# EAGLE board HarpyFC (EAGLE 9.5.1)
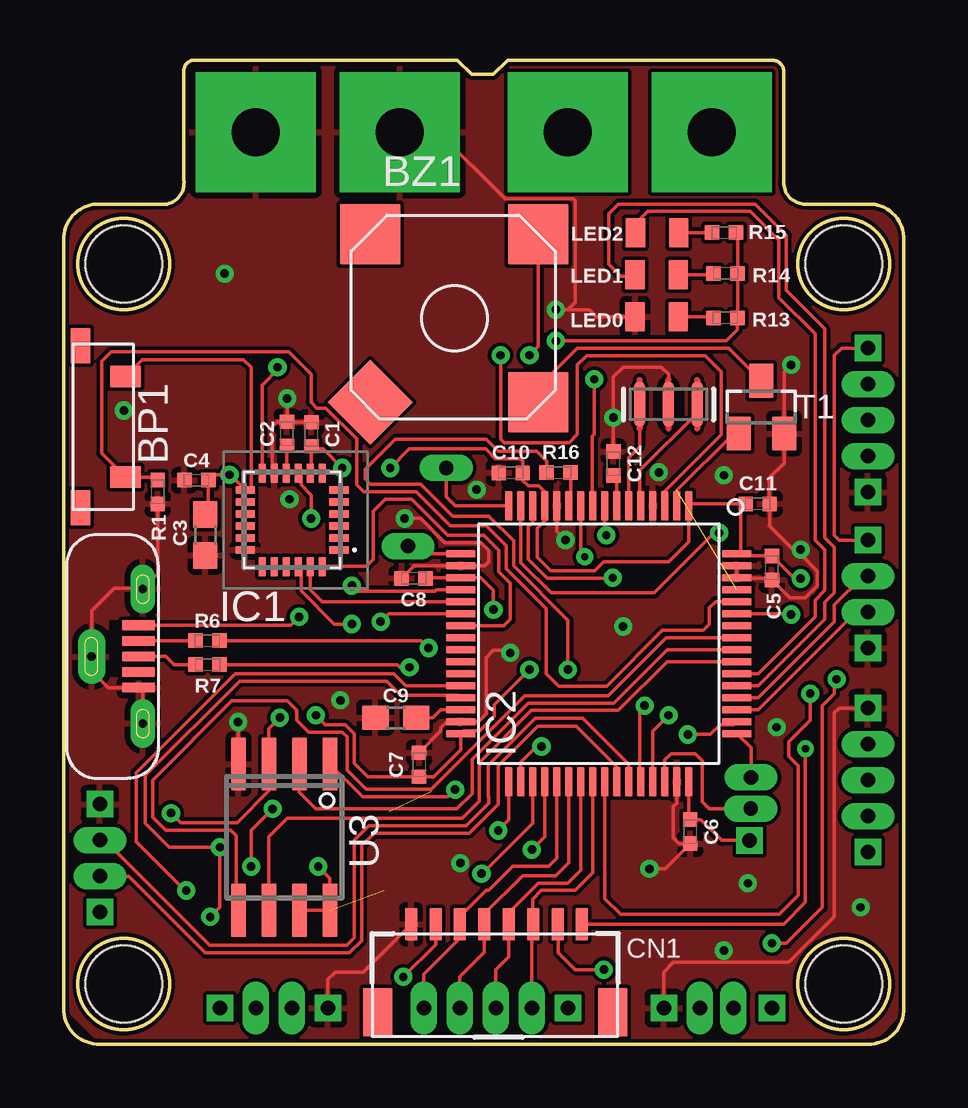
[diagram p0: board, top side]
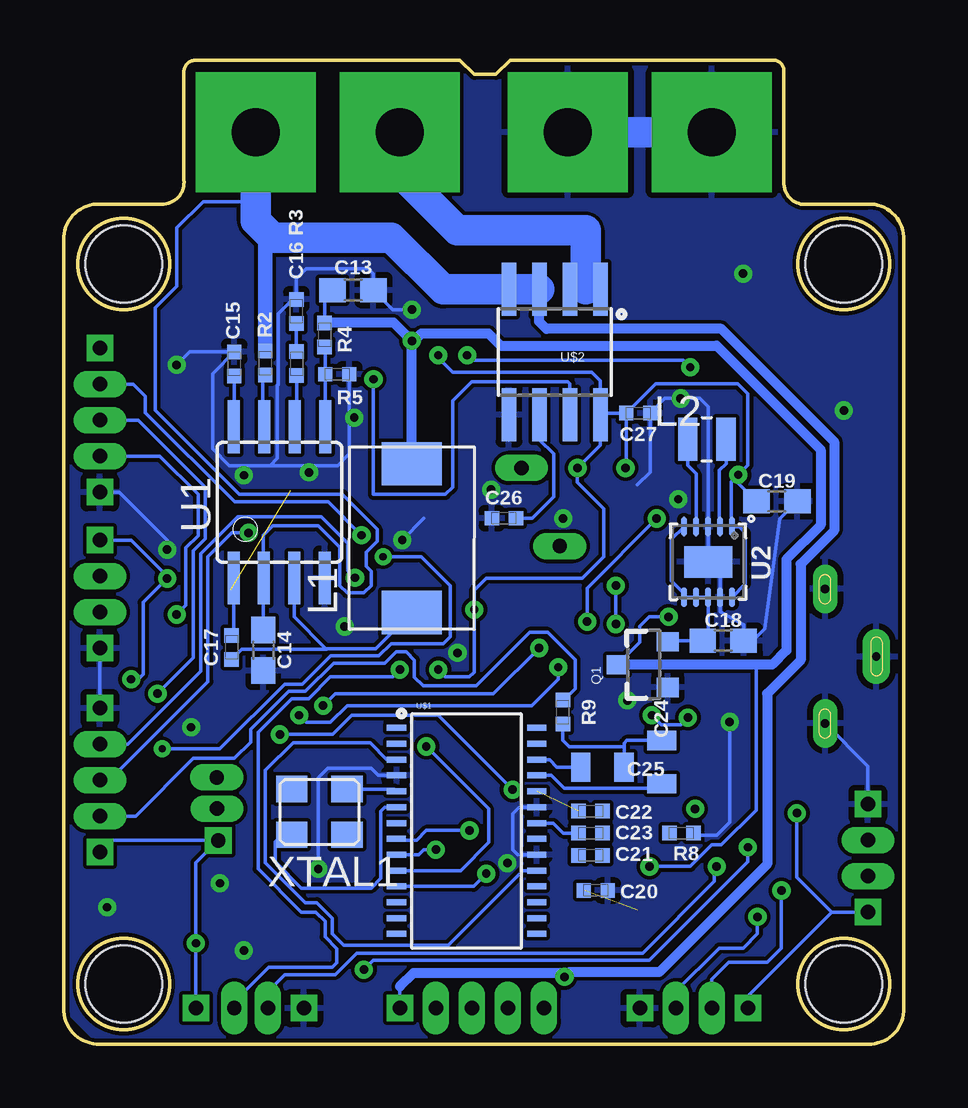
[diagram p1: board, bottom side, seen from below]

Size 35 x 41 mm. Coordinates in mm from the lower left corner, seen from the top.
Outline: 0,1.5 0,33.5 arc-94 1.5,35 4.3,35 arc84 5,36 5,40.5 arc-103 5.5,41 16.4,41 17,40.4 17.9,40.4 18.5,41 29.5,41 arc-90 30,40.5 30,36 arc103 31,35 33.5,35 arc-94 35,33.5 35,1.5 arc-94 33.5,0 1.5,0 arc-94 0,1.5
Outline: circle at 2.5,32.5 radius 1.9
Outline: circle at 32.5,32.5 radius 1.9
Outline: circle at 2.5,2.5 radius 1.9
Outline: circle at 32.5,2.5 radius 1.9
Copper layers (1*16): Top 0.035mm / dielectric 1.5mm / Bottom 0.035mm
Design rules "default *": minimum track width 6mil, minimum drill 0.3mm, track to track 6mil, track to pad 6mil, pad to pad 6mil, via to via 6mil, smd to smd 6mil, copper to edge 6mil, drill to drill 6mil, minimum pad ring 10mil, minimum via ring 8mil, stop-mask expansion 4mil, vias tented up to drill 0mil, thermal gap 10mil
Holes 3.2 mm at 2.5,32.5 32.5,32.5 2.5,2.5 32.5,2.5

## Footprints (pad centres in the part's own frame; a part is rotated, then mirrored left to right if it is on the bottom)
TL3330 = smd 1.45 x 0.8: P$1 -3.375,-1; P$2 3.375,-1 | smd 0.9 x 1.27: P$3 -2.1,0.885; P$4 2.1,0.885
CMT-8530S-SMT-TR = smd 2.5 x 2.5 rotated 45: P$1 0,0 | smd 2.5 x 2.5: P$2 0,7; P$3 7,0; P$4 7,7
0402-TIGHT = smd 0.6 x 0.6: 1 -0.5,0; 2 0.5,0
0603 = smd 1.1 x 1: 1 -0.85,0; 2 0.85,0
0805 = smd 0.8 x 1.2: 1 -0.9,0; 2 0.9,0
JSTSH8 = smd 0.5 x 1.35: 1 1.532,-0.391; 2 2.532,-0.391; 3 3.548,-0.391; 4 4.564,-0.391; 5 5.58,-0.391; 6 6.596,-0.391; 7 7.612,-0.391; 8 8.628,-0.391 | smd 1.2 x 2: NC1 0.232,3.284; NC2 10.022,3.284
ICM20689 = smd 0.8 x 0.3: 1 -1.95,1.25; 2 -1.95,0.75; 3 -1.95,0.25; 4 -1.95,-0.25; 5 -1.95,-0.75; 6 -1.95,-1.25; 13 1.95,-1.25; 14 1.95,-0.75; 15 1.95,-0.25; 16 1.95,0.25; 17 1.95,0.75; 18 1.95,1.25 | smd 0.3 x 0.8: 7 -1.25,-1.95; 8 -0.75,-1.95; 9 -0.25,-1.95; 10 0.25,-1.95; 11 0.75,-1.95; 12 1.25,-1.95; 19 1.25,1.95; 20 0.75,1.95; 21 0.25,1.95; 22 -0.25,1.95; 23 -0.75,1.95; 24 -1.25,1.95
LQFP64 = smd 0.3 x 1.2: 1 -3.75,-5.75; 2 -3.25,-5.75; 3 -2.75,-5.75; 4 -2.25,-5.75; 5 -1.75,-5.75; 6 -1.25,-5.75; 7 -0.75,-5.75; 8 -0.25,-5.75; 9 0.25,-5.75; 10 0.75,-5.75; 11 1.25,-5.75; 12 1.75,-5.75; 13 2.25,-5.75; 14 2.75,-5.75; 15 3.25,-5.75; 16 3.75,-5.75; 33 3.75,5.75; 34 3.25,5.75; 35 2.75,5.75; 36 2.25,5.75; 37 1.75,5.75; 38 1.25,5.75; 39 0.75,5.75; 40 0.25,5.75; 41 -0.25,5.75; 42 -0.75,5.75; 43 -1.25,5.75; 44 -1.75,5.75; 45 -2.25,5.75; 46 -2.75,5.75; 47 -3.25,5.75; 48 -3.75,5.75 | smd 1.2 x 0.3: 17 5.75,-3.75; 18 5.75,-3.25; 19 5.75,-2.75; 20 5.75,-2.25; 21 5.75,-1.75; 22 5.75,-1.25; 23 5.75,-0.75; 24 5.75,-0.25; 25 5.75,0.25; 26 5.75,0.75; 27 5.75,1.25; 28 5.75,1.75; 29 5.75,2.25; 30 5.75,2.75; 31 5.75,3.25; 32 5.75,3.75; 49 -5.75,3.75; 50 -5.75,3.25; 51 -5.75,2.75; 52 -5.75,2.25; 53 -5.75,1.75; 54 -5.75,1.25; 55 -5.75,0.75; 56 -5.75,0.25; 57 -5.75,-0.25; 58 -5.75,-0.75; 59 -5.75,-1.25; 60 -5.75,-1.75; 61 -5.75,-2.25; 62 -5.75,-2.75; 63 -5.75,-3.25; 64 -5.75,-3.75
MPIL0630 = smd 1.8 x 2.5: P$1 0,0; P$2 6.2,0
DFE201612E-INDUCTOR = smd 0.8 x 1.8: P$1 -0.8,0; P$2 0.8,0
SIGNAL_PAD = drill 0.6 long: P$1 0,0
SOT23-3 = smd 0.8 x 0.9: 1 -0.95,-1; 2 0.95,-1; 3 0,1.1
SOT23 = smd 1 x 1.4: 1 -0.95,-1.1; 2 0.95,-1.1; 3 0,1.1
SOIC8 = smd 0.5 x 2.2: 1 -1.905,-3.154; 2 -0.645,-3.154; 3 0.625,-3.154; 4 1.895,-3.154; 5 1.905,3.154; 6 0.635,3.154; 7 -0.635,3.154; 8 -1.905,3.154
VSON-N10 = smd 0.8 x 0.26: 1 -1.475,1; 2 -1.475,0.5; 3 -1.475,0; 4 -1.475,-0.5; 5 -1.475,-1; 6 1.475,-1; 7 1.475,-0.5; 8 1.475,0; 9 1.475,0.5; 10 1.475,1 | smd 1.3 x 2: 11 0,0
M25P32 = smd 0.6 x 2.2: 1 -1.905,-3.048; 2 -0.635,-3.048; 3 0.635,-3.048; 4 1.905,-3.048; 5 1.905,3.048; 6 0.635,3.048; 7 -0.635,3.048; 8 -1.905,3.048
TSSOP28 = smd 0.8 x 0.25: 1 -2.921,4.623; 2 -2.921,3.962; 3 -2.921,3.302; 4 -2.921,2.642; 5 -2.921,1.981; 6 -2.921,1.321; 7 -2.921,0.66; 8 -2.927,0; 9 -2.921,-0.66; 10 -2.921,-1.321; 11 -2.921,-1.981; 12 -2.921,-2.642; 13 -2.921,-3.302; 14 -2.921,-3.962; 15 2.921,-3.962; 16 2.921,-3.302; 17 2.921,-2.642; 18 2.921,-1.981; 19 2.921,-1.321; 20 2.921,-0.66; 21 2.927,0; 22 2.921,0.66; 23 2.921,1.321; 24 2.921,1.981; 25 2.921,2.642; 26 2.921,3.302; 27 2.921,3.962; 28 2.921,4.623
SO08 = smd 0.61 x 2.21: 1 -1.905,-2.616; 2 -0.635,-2.616; 3 0.635,-2.616; 4 1.905,-2.616; 5 1.905,2.616; 6 0.635,2.616; 7 -0.635,2.616; 8 -1.905,2.616
BATTERY_PAD = drill 2 pad 5 square: P$1 0,0
POWER_PAD = drill 0.6 square: P$1 0,0
1051330011-SD = smd 0.4 x 1.35: 1 -1.3,1.725; 2 -0.65,1.725; 3 0,1.725; 4 0.65,1.725; 5 1.3,1.725 | drill 0.35 pad 1.016 long: HOLE3 -2.817,1.895; HOLE4 2.792,1.895 | drill 0.35 pad 1.143 long: HOLE5 0.002,-0.239
SX32Y027000BA1T = smd 1.3 x 1.1: P$1 0,0; P$2 0,1.9; P$3 2.3,0; P$4 2.3,1.9
RESONATOR-SMD-3.2X1.3 = smd 0.45 x 1.905: 1 -1.2,0; 2 0,0; 3 1.2,0

## Placement (x,y rotation side)
BP1  TL3330  [TL3330]  1.69,25.72 270 top
BZ1  BUZZER  [CMT-8530S-SMT-TR]  12.77,26.74 0 top
C1  10nF  [0402-TIGHT]  10.31,25.41 270 top
C2  0.47uF  [0402-TIGHT]  9.29,25.43 270 top
C3  2.2uF  [0603]  5.9,21.21 270 top
C4  0.1uF  [0402-TIGHT]  5.52,23.5 180 top
C5  100nF  [0402-TIGHT]  29.5,19.84 270 top
C6  100nF  [0402-TIGHT]  26.1,8.85 270 top
C7  100nF  [0402-TIGHT]  14.8,11.64 90 top
C8  100nF  [0402-TIGHT]  14.57,19.4 180 top
C9  2.2uF  [0603]  13.83,13.6 180 top
C10  100nF  [0402-TIGHT]  18.62,23.8 0 top
C11  1uF  [0402-TIGHT]  28.91,22.51 0 top
C12  100nF  [0402-TIGHT]  22.9,24.19 270 top
C13  22uF  [0603]  22.95,31.41 0 bottom
C14  10uF  [0603]  26.69,16.41 270 bottom
C15  0.1uF  [0402-TIGHT]  27.9,28.34 90 bottom
C16  3.9nF  [0402-TIGHT]  25.3,28.35 270 bottom
C17  10nF  [0402-TIGHT]  28.01,16.53 90 bottom
C18  10uF  [0603]  7.53,16.81 0 bottom
C19  10uF  [0603]  5.29,22.61 0 bottom
C20  0.1uF  [0402-TIGHT]  12.84,6.4 0 bottom
C21  0.1uF  [0402-TIGHT]  13.05,7.86 0 bottom
C22  0.1uF  [0402-TIGHT]  13.05,9.71 0 bottom
C23  0.1uF  [0402-TIGHT]  13.05,8.79 180 bottom
C24  22uF  [0805]  10.09,11.75 270 bottom
C25  22uF  [0805]  12.56,11.54 180 bottom
C26  1nF  [0402-TIGHT]  16.67,21.91 0 bottom
C27  0.1uF  [0402-TIGHT]  11.07,26.29 180 bottom
CN1  [JSTSH8]  23.1,4.6 180 top
IC1  ICM-20689  [ICM20689]  9.51,21.84 180 top
IC2  STM32F722RGT  [LQFP64]  22.29,16.68 180 top
L1  15uH  [MPIL0630]  20.5,17.98 90 bottom
L2  2.2uH  [DFE201612E-INDUCTOR]  8.21,25.2 0 bottom
LED0  BLUE  [0805]  24.7,30.31 180 top
LED1  BLUE  [0805]  24.7,32.06 180 top
LED2  BLUE  [0805]  24.72,33.81 180 top
P$1  [SIGNAL_PAD]  26.5,1.5 90 top
P$2  [SIGNAL_PAD]  33.5,9.5 0 top
P$3  [SIGNAL_PAD]  33.5,24.5 180 top
P$4  [SIGNAL_PAD]  15,1.5 90 top
P$5  [SIGNAL_PAD]  16.5,1.5 90 top
P$6  [SIGNAL_PAD]  18,1.5 90 top
P$7  [SIGNAL_PAD]  19.5,1.5 90 top
P$12  [SIGNAL_PAD]  1.5,8.5 0 top
P$13  [SIGNAL_PAD]  1.5,7 0 top
P$14  [SIGNAL_PAD]  14.34,20.75 180 top
P$15  [SIGNAL_PAD]  15.93,24.01 0 top
P$16  [SIGNAL_PAD]  33.5,19.5 0 top
P$17  [SIGNAL_PAD]  33.5,18 0 top
P$18  [SIGNAL_PAD]  33.5,11 0 top
P$19  [SIGNAL_PAD]  33.5,12.5 0 top
P$20  [SIGNAL_PAD]  9.5,1.5 90 top
P$21  [SIGNAL_PAD]  8,1.5 90 top
P$22  [SIGNAL_PAD]  33.5,26 0 top
P$23  [SIGNAL_PAD]  33.5,27.5 0 top
P$24  [SIGNAL_PAD]  27.9,1.5 90 top
P$25  [SIGNAL_PAD]  28.62,9.81 180 top
P$26  [SIGNAL_PAD]  28.63,11.11 180 top
Q1  MOSFET-PCHANNEL  [SOT23-3]  10.84,15.81 90 bottom
R1  [0402-TIGHT]  3.91,23.01 90 top
R2  100k  [0402-TIGHT]  26.61,28.37 270 bottom
R3  6.8k  [0402-TIGHT]  25.31,30.53 270 bottom
R4  44.2k  [0402-TIGHT]  24.14,29.55 90 bottom
R5  10k  [0402-TIGHT]  23.61,27.91 180 bottom
R6  [0402-TIGHT]  5.98,16.81 180 top
R7  [0402-TIGHT]  5.99,15.81 180 top
R8  [0402-TIGHT]  9.27,8.79 0 bottom
R9  [0402-TIGHT]  14.21,13.83 270 bottom
R13  [0402-TIGHT]  27.56,30.26 180 top
R14  [0402-TIGHT]  27.57,32.11 180 top
R15  [0402-TIGHT]  27.51,33.81 180 top
R16  [0402-TIGHT]  20.61,23.81 0 top
T1  2N7002E  [SOT23]  29.06,26.54 0 top
U1  MP2307  [SOIC8]  26.02,22.57 0 bottom
U2  TPS63001  [VSON-N10]  8.16,20.09 270 bottom
U3  MX25L6406EM2I-12G  [M25P32]  9.18,8.62 180 top
U$1  MAX7456  [TSSOP28]  18.22,8.55 0 bottom
U$2  ACS712  [SO08]  14.55,28.83 180 bottom
U$3  BATTERY_PAD  [BATTERY_PAD]  21,38 0 top
U$4  BATTERY_PAD  [BATTERY_PAD]  27,38 0 top
U$5  BATTERY_PAD  [BATTERY_PAD]  14,38 0 top
U$6  BATTERY_PAD  [BATTERY_PAD]  8,38 0 top
U$7  [POWER_PAD]  29.5,1.5 90 top
U$8  [POWER_PAD]  25,1.5 90 top
U$9  [POWER_PAD]  33.5,8 0 top
U$10  [POWER_PAD]  11,1.5 90 top
U$11  [POWER_PAD]  28.57,8.49 0 top
U$17  [POWER_PAD]  21,1.5 90 top
U$21  [POWER_PAD]  33.5,16.5 180 top
U$32  [POWER_PAD]  1.5,10 0 top
U$33  [POWER_PAD]  33.5,14 0 top
U$36  [POWER_PAD]  33.5,29 0 top
U$37  [POWER_PAD]  33.5,21 180 top
U$38  [POWER_PAD]  1.5,5.5 0 top
U$39  [POWER_PAD]  33.5,23 0 top
U$40  [POWER_PAD]  6.5,1.5 90 top
USB1  MICROUSB  [1051330011-SD]  1.39,16.15 270 top
XTAL1  CRYSTAL  [SX32Y027000BA1T]  23.2,10.62 180 bottom
Y1  8MHz  [RESONATOR-SMD-3.2X1.3]  25.19,26.66 180 top

## Library data of the parts
BP1 BZ1 C1-C27 CN1 IC2 L1 LED0 LED1 LED2 P$1-P$7 P$12-P$26 R1-R9 R13-R16 T1 U1 U$1 U$3-U$11 U$17 U$21 U$32 U$33 U$36-U$40 USB1 XTAL1 = HarpyFC_Library
IC1 = HarpyFC_Library; DESCRIPTION: IMUs - Inertial Measurement Units 6-Axis DMP-Enabled Drone/VR/IoT solution, Targeted For All Current MPU-6000/6050 Users; HEIGHT: 1mm; MANUFACTURER_NAME: InvenSense Inc.; MANUFACTURER_PART_NUMBER: ICM-20689; MOUSER_PART_NUMBER: 410-ICM-20689; MOUSER_PRICE-STOCK: https://www.mouser.com/Search/Refine.aspx?Keyword=410-ICM-20689
L2 = HarpyFC_Library; MF: Murata; MPN: DFE201612E-2R2M=P2; PARTNO: DFE201612E-2R2M-P2
Q1 = HarpyFC_Library; PROD_ID: TRANS-08285
U2 = HarpyFC_Library; MF: TI; MPN: TPS63001DRCR
U3 = HarpyFC_Library; PARTNO: MX25L6406EM2I-12G
U$2 = HarpyFC_Library; PROD_ID: IC-08964
Y1 = HarpyFC_Library; PROD_ID: XTAL-08895

## Nets
BUZZ: IC2.61 T1.1
CAM_SWITCH: P$24.P$1 R16.1
CURR: CN1.1 IC2.10
DM: IC2.44 R6.1
DP: IC2.45 R7.1
GND: C1.1 C2.1 C3.2 C4.2 C5.2 C6.2 C7.2 C8.2 C9.2 C10.1 C11.2 C12.1 C13.2 C14.2 C15.2 C18.2 C19.2 C20.2 C26.1 C27.1 CN1.8 IC1.11 IC1.18 IC2.4 IC2.12 IC2.18 IC2.31 IC2.47 IC2.62 IC2.63 LED0.2 Q1.1 R1.1 R3.1 R5.1 T1.2 U1.4 U2.3 U2.9 U2.11 U3.4 U$1.4 U$1.20 U$1.23 U$2.5 U$5.P$1 U$6.P$1 U$8.P$1 U$10.P$1 U$21.P$1 U$32.P$1 U$33.P$1 U$39.P$1 USB1.5 USB1.HOLE3 USB1.HOLE4 USB1.HOLE5 Y1.2
IADC: IC2.9 U$2.7
INT: IC1.12 IC2.3
L1: L2.P$1 U2.4
L2: L2.P$2 U2.2
M1: CN1.6 IC2.37 P$4.P$1
M2: CN1.5 IC2.38 P$5.P$1
M3: CN1.4 IC2.39 P$6.P$1
M4: CN1.3 IC2.40 P$7.P$1
M5: IC2.24
M6: IC2.25
M7: IC2.26
M8: IC2.27
N$1: IC2.11 R16.2
N$2: C2.2 IC1.10
N$4: C22.1 U$1.24
N$8: IC2.6 Y1.3
N$9: C9.1 IC2.30
N$10: IC2.5 Y1.1
N$11: BP1.P$4 IC2.60 R1.2
N$12: C12.2 IC2.7
N$13: R2.2 U1.7
N$14: C15.1 U1.8
N$15: C16.2 U1.6
N$16: C16.1 R3.2
N$17: R4.1 R5.2 U1.5
N$18: C17.2 U1.1
N$19: R6.2 USB1.2
N$20: R7.2 USB1.3
N$21: BZ1.P$3 T1.3
N$22: U$1.5 XTAL1.P$1
N$23: U$1.6 XTAL1.P$4
N$26: C23.2 U$1.22
N$27: C24.2 U$1.25
N$28: C25.2 U$1.26
N$29: C24.1 C25.1 R9.2
N$32: LED0.1 R13.2
N$34: LED1.1 R14.2
N$35: IC2.53 LED1.2
N$36: LED2.1 R15.2
N$37: C26.2 U$2.6
N$38: IC2.54 LED2.2
PPM: IC2.41 P$22.P$1
RSSI: IC2.8 P$23.P$1
S$1: U$1.3 U$1.19
S$3: C23.1
SBUS_INV: IC2.59 P$3.P$1
SPI1_CS: IC1.22 IC2.20
SPI1_MISO: IC1.9 IC2.22
SPI1_MOSI: IC1.24 IC2.23
SPI1_SCLK: IC1.23 IC2.21
SPI2_CS: IC2.33 U$1.8
SPI2_MISO: IC2.35 U$1.11
SPI2_MOSI: IC2.36 U$1.9
SPI2_SCLK: IC2.34 U$1.10
SPI3_CS: IC2.50 U3.1
SPI3_MISO: IC2.56 U3.2
SPI3_MOSI: IC2.57 U3.5
SPI3_SCLK: IC2.55 U3.6
SW: C17.1 L1.P$1 U1.3
SWCLK: IC2.49 P$26.P$1
SWDIO: IC2.46 P$25.P$1
UART1_RX: IC2.43 P$12.P$1
UART1_TX: IC2.42 P$13.P$1
UART2_RX: IC2.17 P$14.P$1
UART2_TX: IC2.16 P$15.P$1
UART3_RX: IC2.52 P$16.P$1
UART3_TX: IC2.51 P$17.P$1
UART4_RX: IC2.15 P$18.P$1
UART4_TX: IC2.14 P$19.P$1
UART5_RX: CN1.2 IC2.29 P$20.P$1
UART5_TX: IC2.28 P$21.P$1
VBAT_IN: U$2.1 U$2.2 U$3.P$1
VBAT_OUT: C14.1 CN1.7 R2.1 U1.2 U$2.3 U$2.4 U$4.P$1 U$17.P$1
VCC: C13.1 C20.1 L1.P$2 Q1.3 R4.2 R13.1 R14.1 R15.1 U3.7 U3.8 USB1.1
VCC-REG: C18.1 Q1.2 U2.5 U2.6 U2.7 U2.8
VDD: BP1.P$3 BZ1.P$4 C1.2 C3.1 C4.1 C5.1 C6.1 C7.1 C8.1 C10.2 C11.1 C19.1 C27.2 IC1.8 IC1.13 IC2.1 IC2.13 IC2.19 IC2.32 IC2.48 IC2.64 U2.1 U2.10 U3.3 U$2.8 U$7.P$1 U$9.P$1 U$11.P$1 U$36.P$1 U$37.P$1 U$38.P$1 U$40.P$1
VIN: P$1.P$1
VOUT: P$2.P$1 R9.1

## Tracks (layer width: path | path; a pad name or v marks a point on that pad's centre or on a via)
BUZZ  (1 unrouted)
  Top 0.152: 25.54,23.07 27.91,25.44 T1.1
CAM_SWITCH  (via drill 0.35)
  Top 0.152: R16.1 20.11,24.29 19.7,24.7 18.1,24.7 17.6,25.2 13.8,25.2 12.55,23.95 12.55,23.55 12.78,23.32 14.88,23.32 16.2,22 17.7,22 18.73,20.96 18.73,19.93 21,17.67 v21,15.6
  Bottom 0.152: P$24.P$1 27.9,1.8 27.86,1.8 26.47,3.19 23.83,3.19 23.63,3.4 23.63,3.97 24.11,4.46 24.11,5.12 24.5,5.5 25.11,5.5 26.91,7.3 26.91,12.98 25.5,14.39 24.81,14.39 23.9,15.3 21.3,15.3 v21,15.6
CURR  (via drill 0.3)
  Top 0.152: CN1.1 29.99,4.99 30.9,5.9 v30.9,12.3 | v21.7,20.3 21.54,20.46 IC2.10
  Bottom 0.152: v21.7,20.3 20.1,20.3 18.9,19.1 18.9,16.98 19.2,16.68 21.37,16.68 21.87,16.18 23.89,16.18 25.06,15 25.8,15 28.5,12.3 v30.9,12.3
DM  (via drill 0.35)
  Top 0.152: R6.1 14.89,16.81 v15.2,16.5 | v24.2,14.1 24,13.9 24,10.97 IC2.44
  Bottom 0.152: v24.2,14.1 23.7,14.6 17.1,14.6 v15.2,16.5
DP  (via drill 0.35)
  Top 0.152: R7.1 13.89,15.81 14,15.7 v14.4,15.7 | v25.2,13.7 24.54,13.04 IC2.45
  Bottom 0.152: v14.4,15.7 14.4,15.2 15.5,14.1 23.2,14.1 23.9,13.4 24.9,13.4 v25.2,13.7
GND  (via drill 0.35)
  Top 0.152: USB1.HOLE4 3.29,14.68 USB1.5 1.85,14.85 1.15,15.55 USB1.HOLE5 1.15,18.05 2.1,19 3.25,19 USB1.HOLE3 3.91,19.59 R1.1 | IC2.63 IC2.62 28.07,19.4 29.5,19.4 C5.2 30.24,18.6 30.9,18.6 31.39,19.09 31.39,19.7 30.7,20.4 v30.7,20.6 30.4,20.6 29.4,21.6 29.41,21.61 C11.2 29.4,23.6 30.01,24.21 T1.2 30.01,28.01 v30.3,28.3 | IC2.47 25.54,10.04 25.4,9.9 25.4,8.6 25.65,8.35 C6.2 25.05,7.3 v24.4,7.3 | U$33.P$1 32.3,14 32.1,13.8 32.1,5.3 30.2,3.4 25.4,3.4 25,3 U$8.P$1 | LED0.2 22.19,30.31 21.9,30.6 21,30.6 | 15,38 U$5.P$1 15.6,38 18.38,35.22 21.21,35.22 21.3,35.13 | 21,30.6 v20.5,30.6 | C8.2 14.6,19.93 IC2.18 17.53,19.93 17.7,20.1 17.7,20.57 17.37,20.89 15.87,20.89 14.87,21.9 v14.2,21.9 | C2.1 8.89,25.93 8.69,25.73 8.69,23.86 IC1.11 | CN1.8 12.48,3 11.3,3 11,2.7 U$10.P$1 | C12.1 v22.9,26.1 22.9,27.8 23.3,28.2 24.9,28.2 25.2,27.9 Y1.2 | U3.4 7.28,13.4 v7.26,13.42 | C2.1 v9.3,26.9 | IC2.12 20.54,21.36 v20.9,21 | C2.1 9.33,25.91 C1.1 | 13.47,13.32 C9.2 | 18.7,16.4 17.9,16.4 17.6,16.1 17.6,13.76 17.27,13.43 IC2.31 15.97,13.43 15.71,13.18 15.71,13.05 C7.2 | 21.3,35.1 21.3,30.9 21,30.6
  Bottom 0.152: U$1.20 16.09,7.89 16.3,8.1 16.3,9.6 16.03,9.87 U$1.23 | U$33.P$1 U$21.P$1 | 26.4,24.11 26.1,24.41 26.1,27.46 26.08,27.48 26.08,30.42 25.47,31.03 R3.1 25.31,31.89 24.9,32.3 22.3,32.3 22.1,32.1 C13.2 21.3,30.6 v20.5,30.6 21.29,30.6 C13.2 | 26.4,24.11 28.11,24.11 28.8,24.8 28.8,27.94 C15.2 29.76,28.84 v30.3,28.3 | 23.11,26.31 23.11,24.59 23.59,24.11 26.4,24.11 | U$2.5 16.45,25.16 | 11.1,23.3 10.57,23.83 C27.1 9.96,26.9 v9.3,26.9 8.5,26.9 8.16,26.56 U2.3 U2.11 7.66,19.59 U2.9 7.66,18.02 6.68,17.48 C18.2 6.31,16.81 6.3,16.8 5.8,17.3 5.16,21.89 C19.2 | U$1.4 21.89,11.19 22.2,11.5 24,11.5 24.4,11.1 v24.4,7.3 | v30.7,20.6 30.7,21 32.7,23 U$39.P$1 | v22.9,26.1 23.11,26.31 | 23.11,26.31 R5.1 | v7.26,13.42 7.26,9.24 7.8,8.7 8.68,8.7 | U$32.P$1 1.5,11.57 USB1.HOLE4 | 20,21.9 v20.9,21 | C20.2
  Bottom 1.27: U$6.P$1 U$5.P$1
  other vias: 9.4,22.7 11.52,14.32 16.52,7.54 24.79,23.82 27.5,23.7 23.3,17.4 33.2,5.7 28.5,6.7 6.7,32.1 17.2,23.1 27.5,3.9 29.7,13.2 18.6,16.3 2.5,26.4
  pour Top: 16.4,41 5.6,41 5,40.4 5,35 1.3,35 0,33.7 0,1.6 1.6,0 33.6,0 35,1.4 35,33.8 33.8,35 30.3,35 30,35.3 30,40.4 29.4,41 18.5,41 17.9,40.4 17,40.4
  pour Bottom: 0,33.6 0,1.5 1.5,0 33.5,0 35,1.5 35,33.5 33.5,35 30.4,35 30.1,35.3 30,35.4 30,36.2 30,40.5 29.5,41 18.5,41 17.9,40.4 17,40.4 16.4,41 5.6,41 5.5,41 5,40.5 5,35.3 4.7,35 1.4,35
IADC  (via drill 0.35)
  Top 0.152: IC2.9 22.02,22.41 22.02,25.32 22.1,25.4 v22.1,27.7
  Bottom 0.152: U$2.7 13.91,27.52 14,27.6 18,27.6 18.8,26.8 18.8,23.2 19.1,22.9 22.1,22.9 v22.1,27.7
INT  (via drill 0.35)
  Top 0.152: IC1.12 8.26,27.46 8.95,28.15 v8.9,28.2 | IC2.3 25.04,23.04 27.38,25.38 27.38,28.02 26.72,28.68 21.78,28.68 21.4,28.3 21.4,25.4 21.05,25.05 18.34,25.05 18.2,25.2 v18.2,28.7
  Bottom 0.152: v18.2,28.7 18,28.5 9.2,28.5 v8.9,28.2
L1
  Bottom 0.152: L2.P$1 9.01,24.11 8.66,23.76 U2.4
L2
  Bottom 0.152: L2.P$2 7.41,24.19 7.7,23.9 7.7,21.61 U2.2
M1
  Top 0.152: P$4.P$1 15,2.9 16.5,4.4 CN1.6 16.5,5.3 17.6,6.4 17.7,6.4 18.7,7.4 20.2,7.4 20.54,7.74 IC2.37
M2
  Top 0.152: P$5.P$1 16.5,2.8 17.52,3.82 CN1.5 17.5,5.01 17.5,5.4 19.11,7.01 20.5,7.01 21.04,7.55 IC2.38
M3
  Top 0.152: P$6.P$1 18,3.1 18.54,3.64 CN1.4 18.54,5.47 19.77,6.71 21,6.71 21.54,7.25 IC2.39
M4
  Top 0.152: P$7.P$1 19.5,4.94 19.53,4.97 | 19.53,4.97 CN1.3 | 19.53,4.97 19.53,6.03 19.9,6.4 21.3,6.4 22.04,7.14 IC2.40
N$1
  Top 0.152: R16.2 21.11,22.5 IC2.11
N$2
  Top 0.152: C2.2 9.29,23.82 IC1.10
N$4  (1 unrouted)
N$8
  Top 0.152: Y1.3 23.99,24.88 23.54,24.43 IC2.6
N$9
  Top 0.152: IC2.30 15.7,13.93 15.37,13.6 C9.1
N$10
  Top 0.152: Y1.1 26.39,26.29 24,23.9 24,22.47 IC2.5
N$11
  Top 0.152: R1.2 3.8,23.62 BP1.P$4 1.57,24.62 1.57,28.45 1.96,28.84 9.37,28.84 10.3,27.9 10.3,26.74 10.54,26.5 10.92,26.5 12.21,25.21 12.21,23.75 12.2,23.74 12.2,23.3 12.49,23.01 14.69,23.01 16.1,21.6 17.6,21.6 18.43,20.77 18.43,19.81 20.1,18.14 20.1,15.43 20.61,14.91 22.61,14.91 24.94,17.24 26.64,17.24 26.9,17.5 26.9,18.18 27.16,18.44 IC2.60
N$12
  Top 0.152: C12.2 23.04,23.55 IC2.7
N$13
  Bottom 0.152: U1.7 26.71,25.78 26.71,27.77 R2.2
N$14
  Bottom 0.152: C15.1 27.9,25.75 U1.8
N$15
  Bottom 0.152: C16.2 25.3,25.81 U1.6
N$16
  Bottom 0.152: R3.2 C16.1
N$17
  Bottom 0.152: U1.5 R5.2 24.11,29.02 R4.1
N$18
  Bottom 0.152: C17.2 27.93,17.11 U1.1
N$19
  Top 0.152: R6.2 USB1.2
N$20
  Top 0.152: USB1.3 4.25,16.15 4.6,15.8 R7.2
N$21
  Top 0.152: T1.3 27.7,29 21.4,29 19.77,27.37 BZ1.P$3
N$22
  Bottom 0.152: XTAL1.P$1 21.23,10.62 U$1.5
N$23
  Bottom 0.152: U$1.6 21.63,9.87 21.8,9.7 21.8,6.9 22.2,6.5 25.1,6.5 26.2,7.6 26.2,8.42 25.9,8.72 XTAL1.P$4
N$26
  Bottom 0.152: U$1.22 15.29,9.2 14.6,9.2 14.19,8.79 C23.2
N$27
  Bottom 0.152: U$1.25 14.69,11.19 14.15,10.65 10.29,10.65 C24.2
N$28
  Bottom 0.152: C25.2 14.46,11.54 14.76,11.84 15.29,11.84 U$1.26
N$29
  Bottom 0.152: C24.1 11.55,12.65 11.66,12.54 11.66,12.39 | C25.1 11.66,12.39 | 11.66,12.39 13.95,12.39 14.21,12.65 R9.2
N$32
  Top 0.152: R13.2 27.01,30.31 LED0.1
N$34
  Top 0.152: R14.2 27.02,32.06 LED1.1
N$35
  Top 0.152: IC2.53 28.93,14.93 31.7,17.7 31.7,18.4 32.1,18.8 32.1,20.7 31.7,21.1 31.7,29.8 30.1,31.4 30.1,33.7 28.8,35 23.1,35 22.7,34.6 22.7,32.5 23.2,32 23.74,32 LED1.2
N$36
  Top 0.152: R15.2 LED2.1
N$37
  Bottom 0.152: U$2.6 15.19,25.18 14.59,24.59 14.59,22.81 15.49,21.91 C26.2
N$38
  Top 0.152: IC2.54 28.93,15.43 31.3,17.8 31.3,18.5 31.7,18.9 31.7,20.6 31.3,21 31.3,29.6 29.8,31.11 29.8,33.5 28.6,34.7 24.34,34.7 23.82,34.19 LED2.2
PPM  (via drill 0.35)
  Top 0.152: IC2.41 22.54,6.06 23.2,5.4 29.8,5.4 30.59,6.2 30.59,11.61 30.2,12 30.2,12.6 31.1,13.5 v31.1,14.6
  Bottom 0.152: v31.1,14.6 29.61,16.09 29.61,20.55 29.1,21.06 29.1,23.2 31.9,26 P$22.P$1
RSSI  (via drill 0.35)
  Top 0.152: IC2.8 22.54,21.26 v22.6,21.2
  Bottom 0.152: v22.6,21.2 23.99,22.59 27.89,22.59 31.6,26.3 31.6,27 32.1,27.5 P$23.P$1
S$1
  Bottom 0.152: U$1.3 21.54,11.85 22.24,12.55 25.45,12.55 26.6,11.4 26.6,7.55 24.94,5.89 24.46,5.89 23.81,5.24 23.81,4.59 23.33,4.11 18.99,4.11 15.87,7.23 U$1.19
SBUS_INV  (via drill 0.35)
  Top 0.152: v30.3,17.9 30.27,17.93 IC2.59
  Bottom 0.152: P$3.P$1 31,24.5 29.41,22.91 29.41,21.19 29.91,20.68 29.91,18.29 v30.3,17.9
SPI1_CS  (via drill 0.35)
  Top 0.152: IC2.20 15.52,18.93 15.46,18.87 12.23,18.87 v12,19.1 | IC1.22 9.88,19.77 9.88,18.89 11.27,17.5 v12,17.5
  Bottom 0.152: v12,19.1 v12,17.5
SPI1_MISO  (via drill 0.35)
  Top 0.152: IC2.22 13.53,17.93 v13.2,17.6 | IC1.9 9.88,23.67 9.88,23.3 10.3,22.88 v10.3,21.9
  Bottom 0.152: v10.3,21.9 13.2,19 v13.2,17.6
SPI1_MOSI
  Top 0.152: IC1.24 12.6,19.9 12.9,20.2 12.9,22.2 13.4,22.7 14.5,22.7 16,21.2 17.5,21.2 18.13,20.57 18.13,19.68 18.6,19.21 18.6,17.7 18.33,17.43 IC2.23
SPI1_SCLK
  Top 0.152: IC1.23 10.26,18.94 10.77,18.43 IC2.21
SPI2_CS  (via drill 0.35)
  Top 0.152: IC2.33 18.54,9.34 v18.1,8.9
  Bottom 0.152: v18.1,8.9 19.9,8.9 20.3,8.5 21.1,8.5 U$1.8
SPI2_MISO  (via drill 0.35)
  Top 0.152: IC2.35 19.54,9.2 17.44,7.1 v17.4,7.1
  Bottom 0.152: v17.4,7.1 17.93,6.57 U$1.11
SPI2_MOSI  (via drill 0.35)
  Top 0.152: IC2.36 20.04,8.64 v19.5,8.1
  Bottom 0.152: v19.5,8.1 20,8.1 20.21,7.89 U$1.9
SPI2_SCLK  (via drill 0.35)
  Top 0.152: IC2.34 19.04,11.74 19.7,12.4 v19.9,12.4
  Bottom 0.152: U$1.10 18.47,7.23 17.3,8.4 17.3,9.8 v19.9,12.4
SPI3_CS  (via drill 0.35)
  Top 0.152: U3.1 12.45,10.3 16,10.3 v16.3,10.6 | IC2.50 27.92,13.31 27.34,13.31 26.94,12.9 v26,12.9
  Bottom 0.152: v16.3,10.6 19.4,13.7 23,13.7 23.8,12.9 v26,12.9
SPI3_MISO
  Top 0.152: U3.2 9.8,11.65 9.8,10.5 10.49,9.8 16.37,9.8 17,10.44 17,11.86 19.35,14.21 22.91,14.21 25.13,16.43 IC2.56
SPI3_MOSI
  Top 0.152: U3.5 7.17,5.67 7.17,8.67 6.95,8.9 4.25,8.9 3.7,9.45 3.7,11 7,14.3 9.3,14.3 9.7,13.9 9.7,13.5 10.2,13 11.6,13 11.8,12.8 11.8,11.4 12.59,10.61 15.31,10.61 19.21,14.51 22.68,14.51 25.1,16.93 IC2.57
SPI3_SCLK
  Top 0.152: U3.6 8.54,8.64 9.3,9.4 16.6,9.4 17.31,10.11 17.31,11.73 19.48,13.9 23.1,13.9 25.13,15.93 IC2.55
SW
  Bottom 0.152: U1.3 25.39,17.8 24.08,16.48 | 24.08,16.48 22,16.48 L1.P$1 | 24.08,16.48 24.05,16.45 27.59,16.45 C17.1
SWCLK
  Top 0.152: P$26.P$1 28.63,12.34 IC2.49
SWDIO
  Top 0.152: IC2.46 25.04,11.84 25.3,12.1 26.3,12.1 26.6,11.8 26.6,10.1 26.89,9.81 P$25.P$1
UART1_RX
  Top 0.152: IC2.43 23.54,11.66 21.62,13.58 19.64,13.58 17.69,11.62 17.69,10.31 17.7,10.3 17.7,10.03 16.76,9.1 12.7,9.1 12.1,8.5 12.1,4.43 11.78,4.12 6.08,4.12 1.7,8.5 P$12.P$1
UART1_TX
  Top 0.152: IC2.42 23.04,11.56 21.35,13.25 19.75,13.25 18.1,11.6 18.1,10 16.89,8.79 12.92,8.79 12.4,8.27 12.4,4.3 11.9,3.8 5.9,3.8 2.7,7 P$13.P$1
UART2_RX
  Top 0.152: IC2.17 14.66,20.43 P$14.P$1
UART2_TX
  Top 0.152: IC2.16 16.31,22.43 15.93,22.81 P$15.P$1
UART3_RX
  Top 0.152: IC2.52 28.93,14.43 32.1,17.6 32.1,18.3 33.3,19.5 P$16.P$1
UART3_TX
  Top 0.152: IC2.51 28.93,13.93 33,18 P$17.P$1
UART4_RX  (via drill 0.35)
  Top 0.152: IC2.15 19.04,20.06 20.3,18.8 24.6,18.8 27.1,21.3 v27.3,21.3
  Bottom 0.152: P$18.P$1 33.1,11 29,15.1 29,20.3 28,21.3 v27.3,21.3
UART4_TX  (via drill 0.35)
  Top 0.152: v22.87,19.43 22.84,19.4 20.14,19.4 19.34,20.2 19.34,21.55 19.54,21.74 IC2.14
  Bottom 0.152: P$19.P$1 32.33,12.5 29.3,15.53 29.3,20.43 27.76,21.97 24.27,21.97 23.17,20.87 23.17,19.73 v22.87,19.43
UART5_RX  (via drill 0.35)
  Top 0.152: IC2.29 16.44,14.53 14.04,14.53 13.45,15.12 7.33,15.12 3.4,11.2 3.4,9.21 4.4,8.2 v6.5,8.2 6.5,5.7 v6.1,5.3 | CN1.2 20.6,4.96 20.6,3.8 21.3,3.1 v22.5,3.1
  Bottom 0.152: v6.1,5.3 6.1,4.6 6.7,4 7.7,4 9.5,2.2 P$20.P$1 | v6.5,8.2 6.5,7.6 10.62,3.48 22.11,3.48 v22.5,3.1
UART5_TX  (via drill 0.35)
  Top 0.152: IC2.28 14.24,14.93 13.74,15.43 7.13,15.43 3,11.3 3,8.43 5.03,6.4 v5.1,6.4
  Bottom 0.152: v5.1,6.4 5.1,4 5.7,3.4 7.3,3.4 8,2.7 P$21.P$1
VBAT_IN
  Bottom 0.152: U$2.2 12.7,31.45 | U$2.1 12.7,31.45 | 13.26,31.45 12.7,31.45
  Bottom 1.27: U$3.P$1 21,36.3 18.6,33.9 13.26,33.9 13.26,31.45
VBAT_OUT  (via drill 0.35)
  Top 0.152: CN1.7 15.49,4.15 v14.14,2.8
  Bottom 0.152: U1.2 26.69,19.39 | 26.69,19.39 C14.1 | U$17.P$1 21,2.4 | 15.2,31.43 U$2.3 | 26.69,19.39 26.69,21.21 26.3,21.6 24.4,21.6 23.5,20.7 23.5,19.1 23.2,18.8 22.5,18.8 22.2,19.1 22.2,19.7 22.4,19.9 22.4,20.5 21.95,20.95 21.95,21.45 23.4,22.9 27.7,22.9 31.2,26.4 31.2,30.67 30.3,31.57 30.3,34.01 29.2,35.1 27.6,35.1 27,35.7 U$4.P$1
  Bottom 0.406: 21,2.4 20.43,2.97 14.31,2.97 v14.14,2.8 13.94,3 10.2,3 5.7,7.5 5.7,14.6 4.3,16 4.3,20 2.91,21.39 2.91,25.11 7.6,29.8 14.9,29.8 15.2,30.1 15.2,31.43
  Bottom 0.61: R2.1 26.61,33.91 27,34.3
  Bottom 1.27: U$4.P$1 27,34.3 26.3,33.6 21.35,33.6 19.2,31.45 U$2.4 arc-1 U$2.3
VCC  (via drill 0.35)  (1 unrouted)
  Top 0.152: R15.1 28.07,33.75 R14.1 R13.1 28.06,29.77 27.6,29.3 v20.5,29.3 | U3.7 U3.8 11.09,6.92 v10.6,7.4 | USB1.1 9.45,17.45 v9.8,17.8
  Bottom 0.152: R4.2 24.14,31.07 C13.1 | Q1.3 11,16.75 11,17.4 10.6,17.8 v9.8,17.8 | v10.6,7.4 8.9,7.4 8,8.3 7.6,8.3 6.15,9.75 6.15,15.81 | C20.1 13.34,6.38
  Bottom 0.406: L1.P$2 20.5,29.2 20.45,29.25 | R4.2 21.26,30.06 v20.5,29.3 20.45,29.25 | 20.45,29.25 20.1,29.6 17.3,29.6 16.8,29.1 7.8,29.1 3.47,24.77 3.47,21.62 4.9,20.19 4.9,16.4 5.49,15.81 6.15,15.81 Q1.3
VCC-REG
  Bottom 0.152: U2.5 9.7,21.02 9.7,19.3 9.16,18.76 U2.6 U2.7 U2.8 8.16,16.85 C18.1 9.79,16.81 Q1.2
VDD  (via drill 0.35)
  Top 0.152: IC2.48 26.04,9.41 C6.1 26.54,9.35 27.4,8.49 U$11.P$1 | C8.1 15.1,19.43 IC2.19 17.37,19.43 17.9,18.9 v17.9,18.1 | IC1.13 7.8,23.1 7.8,28.2 7.48,28.52 3.27,28.52 BP1.P$3 | IC1.13 | IC1.8 10.31,23.84 C1.2 10.42,24.8 10.8,24.8 v11.6,24 | v30.7,19.4 30.44,19.4 C5.1 28.13,20.34 IC2.64 28.07,20.46 28.2,20.46 28.2,22.3 C11.1 26.12,22.51 IC2.1 26.04,20.94 25.2,20.1 22.5,20.1 22.12,19.72 20.28,19.72 19.72,20.28 19.72,21.48 20.04,21.81 IC2.13 20.04,23 19.79,23.26 19.34,23.26 19.12,23.48 C10.2 19.12,24.28 19,24.39 17.97,24.39 17.57,24.8 14.4,24.8 v13.6,24 | U$37.P$1 32.3,21 32.1,21.2 32.1,28.7 32.4,29 U$36.P$1 | v29.5,4.2 30.1,4.2 31.6,5.7 31.6,14.1 32.1,14.6 32.1,15.1 v32.2,15.2 | v19.4,15.6 17.93,14.13 17.93,13.67 17.32,13.05 16.66,13.05 IC2.32 16.54,12.27 15.38,11.12 15.36,11.14 C7.1 12.66,11.14 12.11,11.7 12.11,12.93 11.73,13.3 10.9,13.3 v10.5,13.7 | BZ1.P$4 19.77,29.07 v19.4,28.7 | v4.46,9.62 4.86,9.22 7.22,9.22 8.54,10.54 U3.3 8.54,13.14 v9,13.6 | IC1.13 6.93,23.72 v6.9,23.72 6.24,23.72 C4.1 6.02,22.18 C3.1
  Bottom 0.152: C27.2 12.57,26.29 U$2.8 | U2.10 6.6,19.18 6.6,21.3 6.87,21.57 U2.1 7.2,21.61 7.2,23.42 v6.9,23.72 | C27.2 10.34,27.52 6.92,27.52 6.5,27.1 6.5,24.12 v6.9,23.72 | U$9.P$1 33.01,8.49 U$11.P$1 29.5,7.56 v29.5,4.2 U$7.P$1 | C27.2 11.57,24.03 v11.6,24 | U$37.P$1 32.2,21 30.7,19.5 v30.7,19.4 31.7,18.4 31.7,15.4 31.9,15.2 v32.2,15.2 | U$38.P$1 3,5.5 | 3,5.5 6.5,2 U$40.P$1 | v4.46,9.62 4.46,6.96 3,5.5 | U$2.8 12.64,24.95 v13.6,24 13.6,23.4 12.5,22.3 12.5,20.3 13.4,19.4 17.4,19.4 17.9,18.9 v17.9,18.1 17.9,15.5 18.1,15.3 19.1,15.3 v19.4,15.6 | v9,13.6 9.3,13.3 10.1,13.3 v10.5,13.7 | v19.4,28.7 19.4,28.6 18.8,28 13,28 12.64,27.64 U$2.8 | C19.1 6.9,23.37 v6.9,23.72
VIN  (via drill 0.35)
  Top 0.152: v8.7,9.8 7.8,8.9 v7.8,7.4
  Bottom 0.152: P$1.P$1 26.5,2.19 25.8,2.89 23.7,2.89 22.8,3.79 10.89,3.79 7.9,6.78 7.9,7.3 v7.8,7.4
VOUT
  Bottom 0.152: P$2.P$1 32,9.5 29.6,11.9 27.9,11.9 27.21,12.59 27.21,13.11 25.63,14.7 24.93,14.7 23.76,15.87 21.64,15.87 21.16,16.34 20.75,16.34 20.39,15.99 20.39,15.29 20.02,14.92 17.82,14.92 15.59,17.15 14.83,17.15 13.7,16.02 13.7,14.8 14.17,14.33 R9.1